# Altium PCB ECE453_Power.PcbDoc
Units mil, origin at the board's own origin, x right, y up, seen from the top; angles counter-clockwise.
Board outline 2347.18 x 3917.24 mil, 2 copper layers (Top Layer, Bottom Layer); 23 components, 8 nets, 63 pads, 19 vias.
Unrouted connection lines stored in the file: 8.
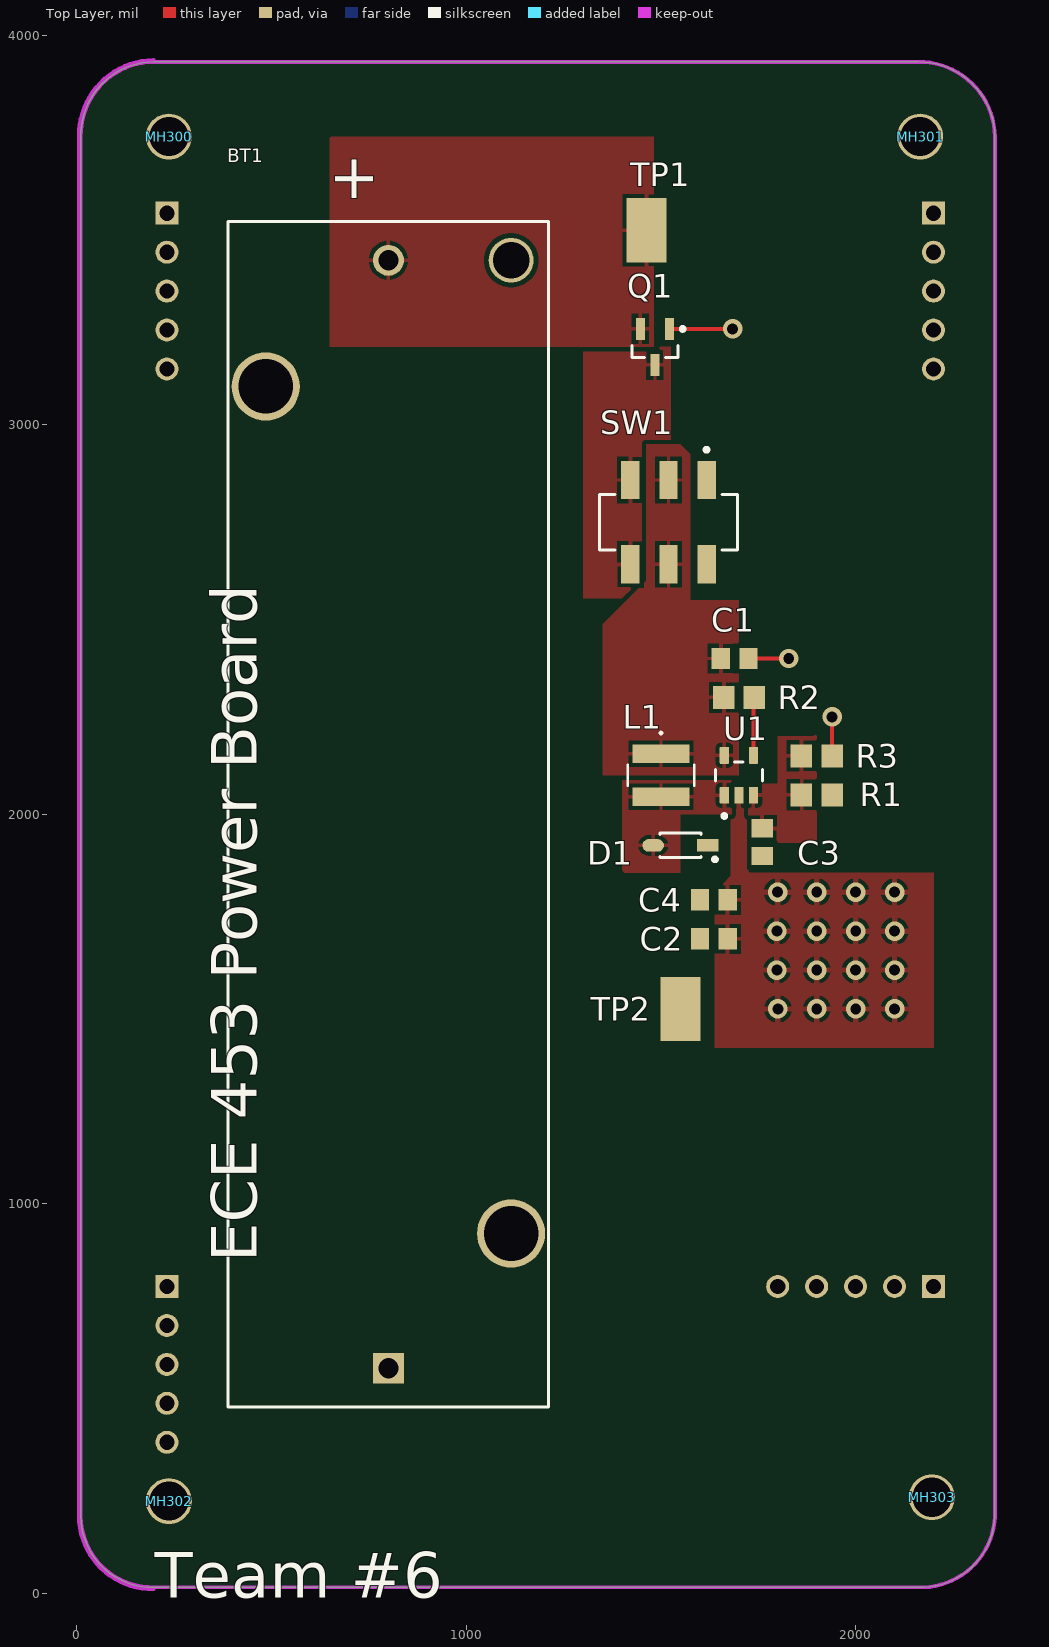
[diagram p0: Top Layer view]
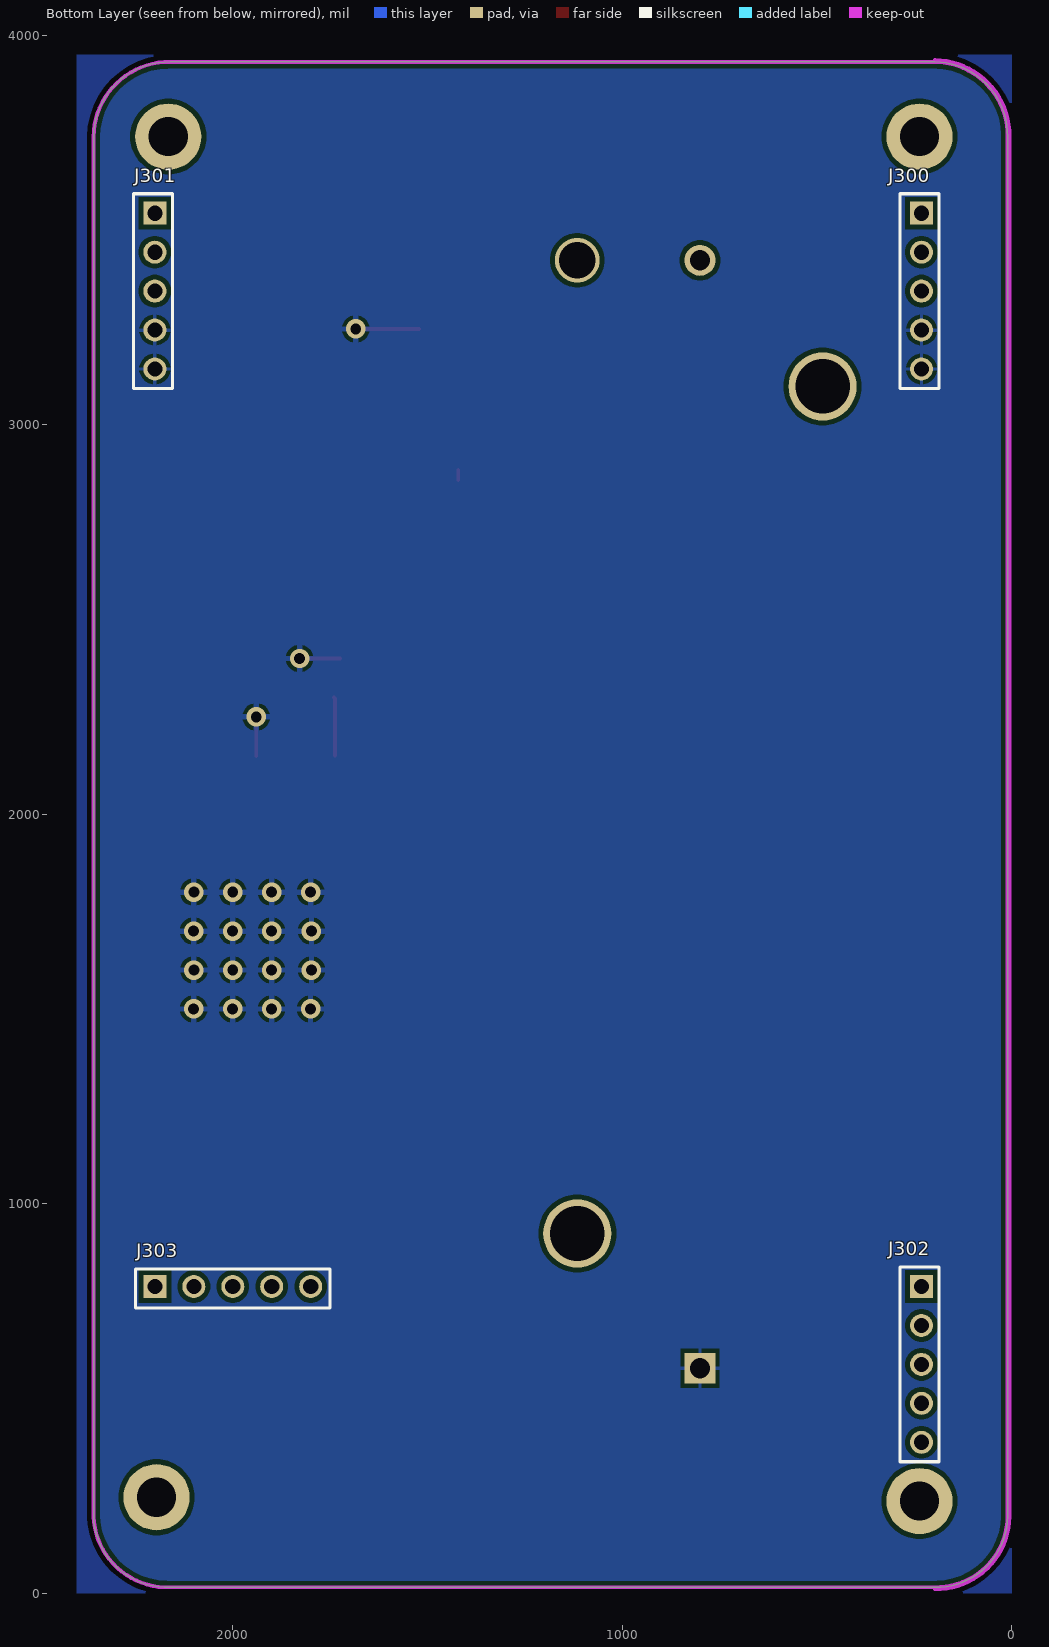
[diagram p1: Bottom Layer view, seen from below]
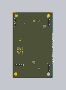
[diagram p2: 3D render of the assembled board from below, using the file's embedded part models]

## Layer stack, top to bottom
Top Solder: solder mask 0.4, Solder Resist, Dk 3.5
Top Layer: signal copper 1.4
Dielectric1: dielectric 12.6, FR-4, Dk 4.8
Bottom Layer: signal copper 1.4
Bottom Solder: solder mask 0.4, Solder Resist, Dk 3.5

## Board outline
10.01,196.88 ccw(c194.35,199.35) 196.78,15.01 cw(c196.85,10) 196.85,15.02 2160.35,15.02 cw(c2160.35,10) 2160.58,15.01 ccw(c2167.85,204.35) 2357.19,196.95 2357.19,3740.13 ccw(c2162.85,3737.66) 2160.45,3931.99 ccw(c2162.85,3737.66) 2160.42,3931.99 2160.45,3931.99 cw(c2160.35,3937.01) 2160.35,3931.99 200,3931.99 cw(c200,3937.01) 198.43,3932.25 cw(c196.85,3937.01) 196.91,3931.99 ccw(c199.35,3742.66) 10.01,3740.25 ccw(c199.35,3742.66) 10.01,3740.22 10.01,3740.25 cw(c5,3740.16) 10.01,3740.16 10.01,196.88 cw(c194.35,199.35)

## Design rules (kind name [scope] priority, off if disabled: settings)
Clearance Polygon_Clearance [All vs InPolygon] p1: gap=12 ignorepadtopadclearanceinfootprint=FALSE except(0: Arc-Hole Track-Hole SMDPad-Hole THPad-Hole Via-Hole Fill-Hole Poly-Hole Region-Hole Text-Hole)
Clearance [All] p2: gap=7.87 ignorepadtopadclearanceinfootprint=TRUE except(0: Arc-Hole Track-Hole SMDPad-Hole THPad-Hole Via-Hole Fill-Hole Poly-Hole Region-Hole Text-Hole)
ComponentClearance [InComponent('U3')] p1: gap=0 collisioncheckmode=3 verticalgap=10 showdistances=FALSE
Height [All] p1: minheight=0 maxheight=866.14 prefheight=500
HoleSize [All] p1: absolutevalues=TRUE maxlimit=250 minlimit=1.18 maxpercent=80.000 minpercent=20.000
MinimumSolderMaskSliver [All] p1: minsoldermaskwidth=7
NetAntennae NetAntennae_5.0V [InNet('5.0V')] p1: netantennaetolerance=0
NetAntennae NetAntennae_3.3V [InNet('3.3V')] p2: netantennaetolerance=0
PolygonConnect [IsNamedPolygon('5.0V_L01_P019') or IsNamedPolygon('3.3V_L01_P020') vs IsVia] p1: connectstyle=Relief reliefconductorwidth=10 reliefentries=4 polygonreliefangle="90 Angle" airgapwidth=10
PolygonConnect PolygonConnect_2 [All vs IsVia] p2: connectstyle=Relief reliefconductorwidth=15 reliefentries=4 polygonreliefangle="90 Angle" airgapwidth=10
PolygonConnect PolygonConnect_1 [All] p3: connectstyle=Relief reliefconductorwidth=10 reliefentries=4 polygonreliefangle="90 Angle" airgapwidth=10
RoutingVias [All] p1: holewidth=28 width=50 viastyle="Through Hole" minholewidth=15 minwidth=25 maxholewidth=28 maxwidth=50
SolderMaskExpansion [All] p1: expansion=4 istentingtop=FALSE
Width [All] p1: maxlimit=472.44 minlimit=3.94 preferedwidth=10 minimp=50.000000 maximp=50.000000 favimp=50.000000
25 further rules are at their usual default settings.

## Components (designator, comment, footprint, x,y, rotation, side; value= is the part's Value field where it differs from the comment)
BT1 "1043" Keystone_1043_0 800,2000 r90 top
C1 "CAP_0805_U_010_00" CAP_0805 1689.17,2400 r180 top value=10µF
C2 "CAP_0805_U_010_00" CAP_0805 1635.43,1679.99 r180 top value=10µF
C3 "CAP_0805_N_001_80" CAP_0805 1760.04,1928.35 r270 top
C4 "CAP_0805_U_010_00" CAP_0805 1635.43,1779.99 r180 top value=10µF
D1 "SM5817PL-TP" On_Semiconductor_425-04_IPC_A 1550,1920.01 r180 top
J300 "CONN_HEADER_MALE_1x5" HDR1X5 236.22,3543.31 r270 bottom
J301 "CONN_HEADER_MALE_1x5" HDR1X5 2204.72,3543.31 r270 bottom
J302 "CONN_HEADER_MALE_1x5" HDR1X5 236.22,787.4 r270 bottom
J303 "CONN_HEADER_MALE_1x5" HDR1X5 2199.61,782.28 r180 bottom
L1 "NRS4018T2R2MDGJ" IND_TAIYO_NRS4018_TAY 1500,2100 r270 top
MH300 "MHOLE_2_55MM" MHOLE_2_55MM#1 236.22,3740.16 r90 top locked
MH301 "MHOLE_2_55MM" MHOLE_2_55MM#1 2165.35,3740.16 r90 top locked
MH302 "MHOLE_2_55MM" MHOLE_2_55MM#1 236.22,236.22 r90 top locked
MH303 "MHOLE_2_55MM" MHOLE_2_55MM#2 2165.35,236.22 r0 top locked
Q1 "SSM3J328R,LF" SOT-23_M 1484.51,3200 r270 top
R1 "30K" RES_0805 1900,2050 r180 top
R2 "RES_0805_K_010.00" RES_0805 1700.2,2300 r180 top
R3 "RES_0805_K_010.00" RES_0805 1899.89,2150 r180 top
SW1 "JS202011SCQN" C&K_Components_0_MFG 1519.18,2750 r180 top
TP1 "TP_1206" TP-SMC-1206 1462.4,3500 r90 top
TP2 "TP_1206" TP-SMC-1206 1550,1500 r270 top
U1 "LM2735XMF-NOPB" Texas_Instruments_DBV0005A_0 1700,2100 r90 top

## Footprints (in the part's own frame and the unit in brackets; to place one, negate y for a bottom-side part, rotate by r counter-clockwise, add the part's x,y. Pads: shape width x height; smd on the part's side, far side on the other; paste and mask are expansions set on the pad)
C&K_Components_0_MFG [mm]
  rect 1.2x2.5 smd paste+0 mask+0: 1(-2.5,-2.75) 2(0,-2.75) 3(2.5,-2.75) 4(-2.5,2.75) 5(0,2.75) 6(2.5,2.75)
  silkscreen extent -4.5,-4.85 4.5,1.8, body extent -4.5,-3.75 4.5,3.75, height 5.51
CAP_0805 [mm]
  rect 1.2x1.4 smd: 1(-0.9,0) 2(0.9,0)
  body extent -1.07,-0.7 1.07,0.7, height 0.7
HDR1X5 [mil] "Connector; Header; 5 Position"
  rect 59.06x59.06 hole 39: 1(0,5)
  round 59.06 hole 39: 2(100,5) 3(200,5) 4(300,5) 5(400,5)
  silkscreen extent -50,-50 450,50, body extent -50,-50 450,50, height 330
IND_TAIYO_NRS4018_TAY [mil]
  rect 47x146 smd paste+0 mask+0: 1(-55,0) 2(55,0)
  silkscreen extent -111,-86 28,86, body extent -81,-81 81,81, height 71
Keystone_1043_0 [mil]
  rect 79.53x79.53 hole 52 paste-39370.1 mask+0: 1(-1422.5,0)
  round 79.53 hole 52 paste-39370.1 mask+0: 2(1422.5,0)
  round 175 hole 140 unplated paste-39370.1 mask+0: ""(-1076.5,-315) ""(1098.5,315)
  round 115 hole 94 unplated paste-39370.1 mask+0: ""(1422.5,-315)
  silkscreen extent -1522,-412 1522,412, body extent -1526,-415 1526,415, height 10
MHOLE_2_55MM#1 [mm] "2.55MM Mounting Hole"
  round 3 / inner round 4.572 / far side round 4.318 hole 2.55: 1(0,0)
MHOLE_2_55MM#2 [mm]
  round 3 / inner round 4.572 / far side round 4.318 hole 2.55: 1(0.762,0.254)
On_Semiconductor_425-04_IPC_A [mm]
  rect 1.408x0.822 smd paste+0 mask+0: 1(-1.78,0)
  rrect100% 1.408x0.822 smd paste+0 mask+0: 2(1.78,0)
  silkscreen extent -2.37,-0.8 1.35,1.04, body extent -2.98,-1.3 2.98,1.3, height 0.25
RES_0805 [mm]
  rect 1.4x1.5 smd: 1(-1,0) 2(1,0)
  body extent -1.07,-0.7 1.07,0.7, height 0.7
SOT-23_M [mm]
  rect 1.45x0.6 smd: 1(-1.175,0.95) 2(-1.175,-0.95) 3(1.175,0)
  silkscreen extent -1.3,-1.5 0.7,1.93, body extent -0.7,-1.5 0.7,1.5, height 1.1
Texas_Instruments_DBV0005A_0 [mm]
  rrect17% 1.1x0.6 smd paste+0 mask+0: 1(-1.3,0.95) 2(-1.3,0) 3(-1.3,-0.95) 4(1.3,-0.95) 5(1.3,0.95)
  silkscreen extent -2.77,-1.53 0.87,1.53, body extent -1.95,-1.63 1.95,1.63, height 0.25
TP-SMC-1206 [mm]
  rect 4.2x2.6 smd mask+0: 1(0,0)
  body extent -1.57,-0.79 1.63,0.81, height 1.22

## Part data
BT1: "Cylindrical Battery Contacts, Clips, Holders & Springs 18650 PCB PLASTIC BATT HLDR THM 1 CELL", Manufacturer 1="Keystone Electronics", Max Operating Temperature=145°C, Min Operating Temperature=-50°C, Package Quantity=100, Supplier Part Number 1=36-1043-ND, Body Material=Nylon, Category="Passive Components", ComponentLink1Description=https://datasheet.ciiva.com/4/1043-4710.pdf?src-supplier=Digi-Key, ComponentLink1URL=https://datasheet.ciiva.com/4/1043-4710.pdf?src-supplier=Digi-Key, ComponentLink2Description=https://datasheet.ciiva.com/3353/1043-eng-tds-3353208.pdf?src-supplier=Distrelec, ComponentLink2URL=https://datasheet.ciiva.com/3353/1043-eng-tds-3353208.pdf?src-supplier=Distrelec, ComponentLink3Description=https://datasheet.ciiva.com/41803/1043-41803215.pdf?src-supplier=Digi-Key, ComponentLink3URL=https://datasheet.ciiva.com/41803/1043-41803215.pdf?src-supplier=Digi-Key, ComponentLink4Description=https://datasheet.ciiva.com/4642/1043-4642493.pdf?src-supplier=Mouser, ComponentLink4URL=https://datasheet.ciiva.com/4642/1043-4642493.pdf?src-supplier=Mouser, Contact Material="Stainless Steel", Contact Plating=Gold, Manufacturer Part Number 1=1043, Material=Nylon, Mount="Through Hole,PCB", Number of Cells=1, Number of Pins=1, Packaging=Tray, Pricing 1="1=3.00000, 25=2.52400, 100=2.08850, 250=1.92020, 500=1.80144 (USD)", RoHS=Yes, Stock 1=3564, Supplier 1=Digi-Key, Termination="PC Pin"
C1 C2 C4: "CAP CER 10UF 10V X5R 0805", Manufacturer="Samsung Electro-Mechanics America, Inc.", Manufacturer Part Number=CL21A106KPCLQNC, Operating Temperature="-55°C ~ 85°C", Package / Case="0805 (2012 Metric)", Ratings=-, Supplier Part Number 1=1276-2402-1-ND, Temperature Coefficient=X5R, Tolerance=±10%, Voltage - Rated=10V, Applications="General Purpose", Category=Capacitors, ComponentLink1Description=http://media.digikey.com/pdf/Data%20Sheets/Samsung%20PDFs/CL21A106KPCLQNC_character.pdf, ComponentLink1URL=http://media.digikey.com/pdf/Data%20Sheets/Samsung%20PDFs/CL21A106KPCLQNC_character.pdf, Features=-, Height - Seated (Max)=-, Lead Spacing=-, Lead Style=-, Mounting Type="Surface Mount, MLCC", Packaging="Cut Tape (CT)", Pricing 1="1=0.2, 10=0.14, 25=0.1052, 50=0.0806, 100=0.0665, 500=0.0469, 1000=0.0385 (USD)", RoHS="RoHS Compliant", Size / Dimension="0.079\" L x 0.049\" W (2.00mm x 1.25mm)", Stock 1=97192, Supplier 1=Digi-Key, Thickness (Max)="0.037\" (0.95mm)"
C3: "MURATA - GRM2165C1H182JA01D - SMD Multilayer Ceramic Capacitor, 1800 pF, 50 V, 0805 [2012 Metric], ± 5%, C0G / NP0, GRM Series", Capacitance=1.8nF, Case Code (Imperial)=0805, Case Code (Metric)=2012, Dielectric=C0G, Manufacturer 1=Murata, Manufacturer Part Number 1=GRM2165C1H182JA01D, Max Operating Temperature=125°C, Min Operating Temperature=-55°C, Package Quantity=1, Supplier Part Number 1=490-1626-1-ND, Temperature Coefficient=30ppm/°C, Tolerance=5%, Voltage=50V, Case/Package=0805, Category="Ceramic Capacitors", ComponentLink1Description=https://datasheet.ciiva.com/25730/cl21a106kpclqnc-25730594.pdf, ComponentLink1URL=https://datasheet.ciiva.com/25730/cl21a106kpclqnc-25730594.pdf, ComponentLink2Description=https://datasheet.ciiva.com/134/partnumbering-e-01-134098.pdf?src-supplier=Digi-Key, ComponentLink2URL=https://datasheet.ciiva.com/134/partnumbering-e-01-134098.pdf?src-supplier=Digi-Key, ComponentLink3Description=https://datasheet.ciiva.com/26920/getdatasheetpartid-355170-26920201.pdf, ComponentLink3URL=https://datasheet.ciiva.com/26920/getdatasheetpartid-355170-26920201.pdf, ComponentLink4Description=https://datasheet.ciiva.com/134/partnumbering-e-01-134100.pdf?src-supplier=Digi-Key, ComponentLink4URL=https://datasheet.ciiva.com/134/partnumbering-e-01-134100.pdf?src-supplier=Digi-Key, ComponentLink5Description=https://datasheet.ciiva.com/134/partnumbering-e-01-134099.pdf?src-supplier=Digi-Key, ComponentLink5URL=https://datasheet.ciiva.com/134/partnumbering-e-01-134099.pdf?src-supplier=Digi-Key, Construction=Flat, Depth=1.25mm, Height=0.6mm, Lead Free="Lead Free", Length=2mm, Mount="Surface Mount", Packaging="Tape and Reel", Pricing 1="1=0.20000, 10=0.14000, 50=0.08380, 100=0.07080, 500=0.04844, 1000=0.04285 (USD)", Radiation Hardening=No, REACH SVHC="No SVHC", RoHS=Yes, RoHS Compliant=Yes, Series=GRM, Stock 1=44565, Supplier 1=Digi-Key, Termination=SMD/SMT, Thickness=0.028inch, Voltage Rating=50V, Voltage Rating (DC)=50V, Width=0.049inch
D1: "DIODE SCHOTTKY 20V 1A SOD123FL", Average Rectified Current=1A, Forward Voltage=450mV, Manufacturer 2=MCC, Max Operating Temperature=125°C, Max Reverse Voltage (DC)=20V, Max Surge Current=30A, Min Operating Temperature=-65°C, Package Quantity=1, Supplier Part Number 1=SM5817PL-TPMSCT-ND, Category="Rectifier Diodes", ComponentLink1Description=https://datasheet.ciiva.com/15200/getdatasheetpartid-487494-15200581.pdf?src-supplier=Verical, ComponentLink1URL=https://datasheet.ciiva.com/15200/getdatasheetpartid-487494-15200581.pdf?src-supplier=Verical, ComponentLink2Description=https://datasheet.ciiva.com/912/sm5817pl-sm5819plsod-123fl-912827.pdf?src-supplier=Digi-Key, ComponentLink2URL=https://datasheet.ciiva.com/912/sm5817pl-sm5819plsod-123fl-912827.pdf?src-supplier=Digi-Key, Element Configuration=Single, Manufacturer Part Number 2=SM5817PL-TP, Mount="Surface Mount", Number of Pins=2, Packaging="Tape and Reel", Peak Non-Repetitive Surge Current=30A, Pricing 2="1=0.46000, 10=0.31900, 100=0.16110, 500=0.13144, 1000=0.09752 (USD)", Radiation Hardening=No, Reverse Voltage=20V, RoHS=Yes, RoHS Compliant=Yes, Stock 2=178040, Supplier 1=Digi-Key
J300 J301 J302 J303: "Header, 5-Pin", Color=Black, Manufacturer 1=Sullins, Manufacturer Part Number 1=PREC005SACN-RC, Package Quantity=1, Supplier Part Number 1=S1032EC-05-ND, ComponentLink1Description=http://www.farnell.com/cad/1737268.pdf, ComponentLink1URL=http://www.farnell.com/cad/1737268.pdf, ComponentLink2Description=http://katalog.we-online.de/em/datasheet/6130xx11121.pdf, ComponentLink2URL=http://katalog.we-online.de/em/datasheet/6130xx11121.pdf, ComponentLink3Description=https://datasheet.ciiva.com/741/xrxczzzsxxn-rc-st-11635-b-741840.pdf?src-supplier=Digi-Key, ComponentLink3URL=https://datasheet.ciiva.com/741/xrxczzzsxxn-rc-st-11635-b-741840.pdf?src-supplier=Digi-Key, Connector Type="Male Pin", Contact Mating Length=0.23inch, Contact Plating=Tin, Mount="Through Hole", Number of Positions=5, Number of Rows=1, Packaging=Bulk, Pitch=0.1inch, Pricing 1="1=0.19000, 10=0.17400, 25=0.12960, 50=0.11120, 100=0.10740, 250=0.09264, 500=0.08892 (USD)", RoHS=Yes, Stock 1=0, Supplier 1=Digi-Key, Termination=Solder
L1: "Inductor Power Shielded Wirewound 2.2uH 20% 100KHz Ferrite 2.2A 0.0504Ohm DCR 1515 T/R", Case/Package=Nonstandard, Current Rating=2.2A, DC Resistance (DCR)=50.4mR, Inductance=2.2uH, Inductance Tolerance=20%, Manufacturer 1="Taiyo Yuden", Max DC Current=3A, Max Operating Temperature=125°C, Min Operating Temperature=-25°C, Package Quantity=3500, Resistor Type=Wirewound, Self Resonant Frequency=60MHz, Supplier Part Number 1=587-2890-1-ND, Test Frequency=100kHz, Category="Fixed Inductors", ComponentLink1Description=https://datasheet.ciiva.com/8502/nr6028t2r2n-ss-8502679.pdf?src-supplier=Avnet, ComponentLink1URL=https://datasheet.ciiva.com/8502/nr6028t2r2n-ss-8502679.pdf?src-supplier=Avnet, ComponentLink2Description=https://datasheet.ciiva.com/15988/8nr6028t2r2n-15988110.pdf?src-supplier=Onlinecomponents.com, ComponentLink2URL=https://datasheet.ciiva.com/15988/8nr6028t2r2n-15988110.pdf?src-supplier=Onlinecomponents.com, ComponentLink3Description=https://datasheet.ciiva.com/7291/nr6028t2r2n-ss-7291637.pdf?src-supplier=Newark, ComponentLink3URL=https://datasheet.ciiva.com/7291/nr6028t2r2n-ss-7291637.pdf?src-supplier=Newark, ComponentLink4Description=https://datasheet.ciiva.com/1043/wound04-e-1043090.pdf?src-supplier=Digi-Key, ComponentLink4URL=https://datasheet.ciiva.com/1043/wound04-e-1043090.pdf?src-supplier=Digi-Key, ComponentLink5Description=https://datasheet.ciiva.com/1043/wound04-e-1043091.pdf?src-supplier=Digi-Key, ComponentLink5URL=https://datasheet.ciiva.com/1043/wound04-e-1043091.pdf?src-supplier=Digi-Key, ComponentLink6Description=https://datasheet.ciiva.com/1043/wound04-e-1043092.pdf?src-supplier=Digi-Key, ComponentLink6URL=https://datasheet.ciiva.com/1043/wound04-e-1043092.pdf?src-supplier=Digi-Key, ComponentLink7Description=https://datasheet.ciiva.com/8502/nrs4018t2r2mdgj-ss-8502646.pdf?src-supplier=Avnet, ComponentLink7URL=https://datasheet.ciiva.com/8502/nrs4018t2r2mdgj-ss-8502646.pdf?src-supplier=Avnet, ComponentLink8Description=https://datasheet.ciiva.com/7291/nrs4018t2r2mdgj-ss-7291680.pdf?src-supplier=Newark, ComponentLink8URL=https://datasheet.ciiva.com/7291/nrs4018t2r2mdgj-ss-7291680.pdf?src-supplier=Newark, ComponentLink9Description=https://datasheet.ciiva.com/25607/0900766b810b3cd2-25607949.pdf?src-supplier=RSComponents, ComponentLink9URL=https://datasheet.ciiva.com/25607/0900766b810b3cd2-25607949.pdf?src-supplier=RSComponents, Core Material=Ferrite, Depth=4.2mm, Halogen Free="Halogen Free", Height=1.8mm, Height - Seated (Max)=0.071inch, Lead Free="Lead Free", Lead Pitch=2.8mm, Length=4mm, Manufacturer Part Number 1=NRS4018T2R2MDGJ, Mount="Surface Mount", Number of Pins=2, Packaging="Tape and Reel", Pricing 1="1=0.27000, 10=0.23800, 25=0.20840, 50=0.17860, 100=0.16370, 250=0.14884, 500=0.13990, 1000=0.10716 (USD)", Radiation Hardening=No, REACH SVHC=Unknown, RMS Current (Irms)=2.2A, RoHS=Yes, RoHS Compliant=Yes, Saturation Current=3A, Series=NRS, Shielding=Shielded, Stock 1=291635, Supplier 1=Digi-Key, Termination=SMD/SMT, Tolerance=20%, Width=0.157inch
MH300 MH301 MH302 MH303: "Mounting Holde", Manufacturer Part Number="UW MTHOLE"
Q1: "MOSFET P-CH 20V 6A SOT23F", Case/Package=SOT-23-3, Continuous Drain Current (ID)=6A, Drain to Source Breakdown Voltage=-20V, Drain to Source Resistance=47.4mR, Drain to Source Voltage (Vdss)=20V, Gate to Source Voltage (Vgs)=8V, Input Capacitance=840pF, Manufacturer 1=Toshiba, Max Operating Temperature=150°C, Max Power Dissipation=1W, Min Operating Temperature=-55°C, Package Quantity=3000, Power Dissipation=2W, Supplier Part Number 1=SSM3J328RLFCT-ND, Category=MOSFETs, ComponentLink1Description=https://datasheet.ciiva.com/11158/ssm3j328r-datasheet-en-20140301-11158652.pdf?src-supplier=Avnet, ComponentLink1URL=https://datasheet.ciiva.com/11158/ssm3j328r-datasheet-en-20140301-11158652.pdf?src-supplier=Avnet, ComponentLink2Description=https://datasheet.ciiva.com/24106/ssm3j328r-datasheet-en-20140301-24106699.pdf?src-supplier=Mouser, ComponentLink2URL=https://datasheet.ciiva.com/24106/ssm3j328r-datasheet-en-20140301-24106699.pdf?src-supplier=Mouser, ComponentLink3Description=https://datasheet.ciiva.com/45425/ssm3j328r-datasheet-en-20140301-45425519.pdf?src-supplier=Digi-Key, ComponentLink3URL=https://datasheet.ciiva.com/45425/ssm3j328r-datasheet-en-20140301-45425519.pdf?src-supplier=Digi-Key, ComponentLink4Description=https://datasheet.ciiva.com/45425/ssm3j328r-datasheet-en-20140301-45425813.pdf?src-supplier=Digi-Key, ComponentLink4URL=https://datasheet.ciiva.com/45425/ssm3j328r-datasheet-en-20140301-45425813.pdf?src-supplier=Digi-Key, Element Configuration=Single, Manufacturer Part Number 1=SSM3J328R,LF, Mount="Surface Mount", Number of Channels=1, Number of Elements=1, Number of Pins=3, Packaging="Tape and Reel", Polarity=P-CHANNEL, Pricing 1="1=0.43000, 10=0.32200, 25=0.29040, 100=0.20060, 500=0.13728, 1000=0.10560 (USD)", Radiation Hardening=No, Rds On Max=29.8mR, RoHS=Yes, RoHS Compliant=Yes, Stock 1=476474, Supplier 1=Digi-Key, Turn-Off Delay Time=107ns, Turn-On Delay Time=32ns
R1: library part RES_0805_K_030.00, "Res Thick Film 0805 30K Ohm 1% 0.125W(1/8W) ±100ppm/°C Pad SMD Automotive T/R", Case Code (Imperial)=0805, Case Code (Metric)=2012, Manufacturer 1=Panasonic, Manufacturer Part Number 1=ERJ-6ENF3002V, Max Operating Temperature=155°C, Max Power Dissipation=125mW, Min Operating Temperature=-55°C, Package Quantity=1, Resistance Tolerance=1%, Resistor Type="Thick Film", Supplier Part Number 1=P30.0KCCT-ND, Temperature Coefficient=100ppm/°C, Voltage Rating=150V, Case/Package=0805, Category="Chip SMD Resistors", ComponentLink1Description=https://datasheet.ciiva.com/11821/0900766b80f80784-11821600.pdf?src-supplier=RSComponents, ComponentLink1URL=https://datasheet.ciiva.com/11821/0900766b80f80784-11821600.pdf?src-supplier=RSComponents, ComponentLink2Description=https://datasheet.ciiva.com/9117/aoa0000ce2-9117485.pdf?src-supplier=Avnet, ComponentLink2URL=https://datasheet.ciiva.com/9117/aoa0000ce2-9117485.pdf?src-supplier=Avnet, ComponentLink3Description=https://datasheet.ciiva.com/24124/aoa0000ce2-24124393.pdf?src-supplier=Mouser, ComponentLink3URL=https://datasheet.ciiva.com/24124/aoa0000ce2-24124393.pdf?src-supplier=Mouser, ComponentLink4Description=https://datasheet.ciiva.com/30169/aoa0000ce2-30169447.pdf?src-supplier=Onlinecomponents.com, ComponentLink4URL=https://datasheet.ciiva.com/30169/aoa0000ce2-30169447.pdf?src-supplier=Onlinecomponents.com, ComponentLink5Description=https://datasheet.ciiva.com/17210/aoa0000ce2-17210478.pdf?src-supplier=Avnet+Europe, ComponentLink5URL=https://datasheet.ciiva.com/17210/aoa0000ce2-17210478.pdf?src-supplier=Avnet+Europe, ComponentLink6Description=https://datasheet.ciiva.com/22673/1678782-22673293.pdf?src-supplier=Element14, ComponentLink6URL=https://datasheet.ciiva.com/22673/1678782-22673293.pdf?src-supplier=Element14, ComponentLink7Description=https://datasheet.ciiva.com/28565/1694929-28565193.pdf?src-supplier=Element14, ComponentLink7URL=https://datasheet.ciiva.com/28565/1694929-28565193.pdf?src-supplier=Element14, ComponentLink8Description=https://datasheet.ciiva.com/46441/1678782-46441405.pdf?src-supplier=Element14, ComponentLink8URL=https://datasheet.ciiva.com/46441/1678782-46441405.pdf?src-supplier=Element14, ComponentLink9Description=https://datasheet.ciiva.com/46441/1678782-46441406.pdf?src-supplier=Element14, ComponentLink9URL=https://datasheet.ciiva.com/46441/1678782-46441406.pdf?src-supplier=Element14, ComponentLink10Description=https://datasheet.ciiva.com/16512/aoa0000ce2-16512236.pdf?src-supplier=Avnet+Asia, ComponentLink10URL=https://datasheet.ciiva.com/16512/aoa0000ce2-16512236.pdf?src-supplier=Avnet+Asia, ComponentLink11Description=https://datasheet.ciiva.com/7711/1678782-7711062.pdf?src-supplier=Element14, ComponentLink11URL=https://datasheet.ciiva.com/7711/1678782-7711062.pdf?src-supplier=Element14, Construction=Rectangular, Contact Plating=Tin, Depth=1.25mm, Features="Automotive AEC-Q200", Height=0.6mm, Lead Free="Lead Free", Length=2mm, Military Standard=Not, Mount="Surface Mount", Number of Terminations=2, Packaging="Tape and Reel", Power Rating=125mW, Pricing 1="1=0.10000, 10=0.07500, 100=0.02880, 1000=0.01265, 2500=0.01092 (USD)", Radiation Hardening=No, REACH SVHC=Unknown, Resistance=30K, RoHS=Yes, RoHS Compliant=Yes, Series=ERJ, Stock 1=296893, Supplier 1=Digi-Key, Technology="THICK FILM", Termination=SMD/SMT, Tolerance=1%, Voltage Rating (DC)=150V, Weight=0.000194oz, Width=0.049inch
R2: "RES SMD 10K OHM 1% 1/8W 0805", Case Code (Imperial)=0805, Case Code (Metric)=2012, Manufacturer 1=Yageo, Manufacturer Part Number 1=RC0805FR-0710KL, Max Operating Temperature=155°C, Max Power Dissipation=125mW, Min Operating Temperature=-55°C, Package Quantity=1, Resistance=100kR, Resistance Tolerance=1%, Resistor Type="Thick Film", Supplier Part Number 1=311-10.0KCRCT-ND, Temperature Coefficient=100ppm/°C, Voltage Rating=150V, Case/Package=0805, Category="Chip SMD Resistors", ComponentLink1Description=https://datasheet.ciiva.com/11808/0900766b8106beab-11808151.pdf?src-supplier=RSComponents, ComponentLink1URL=https://datasheet.ciiva.com/11808/0900766b8106beab-11808151.pdf?src-supplier=RSComponents, ComponentLink2Description=https://datasheet.ciiva.com/12669/rc0805-12669688.pdf?src-supplier=Mouser, ComponentLink2URL=https://datasheet.ciiva.com/12669/rc0805-12669688.pdf?src-supplier=Mouser, ComponentLink3Description=https://datasheet.ciiva.com/46447/444164-46447563.pdf?src-supplier=Element14, ComponentLink3URL=https://datasheet.ciiva.com/46447/444164-46447563.pdf?src-supplier=Element14, ComponentLink4Description=https://datasheet.ciiva.com/2456/pyu-r-int-thick-7-2456972.pdf?src-supplier=Digi-Key, ComponentLink4URL=https://datasheet.ciiva.com/2456/pyu-r-int-thick-7-2456972.pdf?src-supplier=Digi-Key, ComponentLink5Description=https://datasheet.ciiva.com/2456/pyu-r-int-thick-7-2456973.pdf?src-supplier=Digi-Key, ComponentLink5URL=https://datasheet.ciiva.com/2456/pyu-r-int-thick-7-2456973.pdf?src-supplier=Digi-Key, ComponentLink6Description=https://datasheet.ciiva.com/2456/pyu-r-int-thick-7-2456974.pdf?src-supplier=Digi-Key, ComponentLink6URL=https://datasheet.ciiva.com/2456/pyu-r-int-thick-7-2456974.pdf?src-supplier=Digi-Key, ComponentLink7Description=https://datasheet.ciiva.com/16747/rc0805-16747087.pdf?src-supplier=Future+Electronics, ComponentLink7URL=https://datasheet.ciiva.com/16747/rc0805-16747087.pdf?src-supplier=Future+Electronics, Construction=Rectangular, Depth=1.25mm, Features="Moisture Resistant", Height=0.024inch, Lead Free="Lead Free", Length=2mm, Military Standard=Not, Number of Terminations=2, Packaging="Tape and Reel", Power Rating=125mW, Pricing 1="1=0.10000, 10=0.04200, 100=0.01690, 1000=0.00759, 2500=0.00659 (USD)", REACH SVHC=Unknown, RoHS=Yes, RoHS Compliant=Yes, Series=RC, Size Code=0805, Stock 1=7562122, Supplier 1=Digi-Key, Technology="THICK FILM", Termination=SMD/SMT, Tolerance=1%, Width=0.049inch
R3: "RES SMD 10K OHM 1% 1/8W 0805", Case Code (Imperial)=0805, Case Code (Metric)=2012, Manufacturer 1=Yageo, Manufacturer Part Number 1=RC0805FR-0710KL, Max Operating Temperature=155°C, Max Power Dissipation=125mW, Min Operating Temperature=-55°C, Package Quantity=1, Resistance=10kR, Resistance Tolerance=1%, Resistor Type="Thick Film", Supplier Part Number 1=311-10.0KCRCT-ND, Temperature Coefficient=100ppm/°C, Voltage Rating=150V, Case/Package=0805, Category="Chip SMD Resistors", ComponentLink1Description=https://datasheet.ciiva.com/11808/0900766b8106beab-11808151.pdf?src-supplier=RSComponents, ComponentLink1URL=https://datasheet.ciiva.com/11808/0900766b8106beab-11808151.pdf?src-supplier=RSComponents, ComponentLink2Description=https://datasheet.ciiva.com/12669/rc0805-12669688.pdf?src-supplier=Mouser, ComponentLink2URL=https://datasheet.ciiva.com/12669/rc0805-12669688.pdf?src-supplier=Mouser, ComponentLink3Description=https://datasheet.ciiva.com/46447/444164-46447563.pdf?src-supplier=Element14, ComponentLink3URL=https://datasheet.ciiva.com/46447/444164-46447563.pdf?src-supplier=Element14, ComponentLink4Description=https://datasheet.ciiva.com/2456/pyu-r-int-thick-7-2456972.pdf?src-supplier=Digi-Key, ComponentLink4URL=https://datasheet.ciiva.com/2456/pyu-r-int-thick-7-2456972.pdf?src-supplier=Digi-Key, ComponentLink5Description=https://datasheet.ciiva.com/2456/pyu-r-int-thick-7-2456973.pdf?src-supplier=Digi-Key, ComponentLink5URL=https://datasheet.ciiva.com/2456/pyu-r-int-thick-7-2456973.pdf?src-supplier=Digi-Key, ComponentLink6Description=https://datasheet.ciiva.com/2456/pyu-r-int-thick-7-2456974.pdf?src-supplier=Digi-Key, ComponentLink6URL=https://datasheet.ciiva.com/2456/pyu-r-int-thick-7-2456974.pdf?src-supplier=Digi-Key, ComponentLink7Description=https://datasheet.ciiva.com/16747/rc0805-16747087.pdf?src-supplier=Future+Electronics, ComponentLink7URL=https://datasheet.ciiva.com/16747/rc0805-16747087.pdf?src-supplier=Future+Electronics, Construction=Rectangular, Depth=1.25mm, Features="Moisture Resistant", Height=0.024inch, Lead Free="Lead Free", Length=2mm, Military Standard=Not, Number of Terminations=2, Packaging="Tape and Reel", Power Rating=125mW, Pricing 1="1=0.10000, 10=0.04200, 100=0.01690, 1000=0.00759, 2500=0.00659 (USD)", REACH SVHC=Unknown, RoHS=Yes, RoHS Compliant=Yes, Series=RC, Size Code=0805, Stock 1=7562122, Supplier 1=Digi-Key, Technology="THICK FILM", Termination=SMD/SMT, Tolerance=1%, Width=0.049inch
SW1: "C & K COMPONENTS - JS202011SCQN - SWITCH, DPDT, 0.6A, 6VDC, SMD", Actuator Color=Black, Contact Current Rating=300mA, Contact Resistance=70mR, Flammability Rating="UL94 V-2", Manufacturer 1="ITT C&K", Max Operating Temperature=85°C, Max Voltage Rating (DC)=6V, Min Operating Temperature=-20°C, Package Quantity=1, Supplier Part Number 1=401-2002-1-ND, Actuator Length=2mm, Actuator Material=Nylon,Polyamide,PA46, Actuator Type=Standard, Category="Slide Switches", ComponentLink1Description=https://datasheet.ciiva.com/2889/js-29aug13-2889127.pdf?src-supplier=Digi-Key, ComponentLink1URL=https://datasheet.ciiva.com/2889/js-29aug13-2889127.pdf?src-supplier=Digi-Key, ComponentLink2Description=https://datasheet.ciiva.com/23829/1707718-23829488.pdf?src-supplier=Newark, ComponentLink2URL=https://datasheet.ciiva.com/23829/1707718-23829488.pdf?src-supplier=Newark, ComponentLink3Description=https://datasheet.ciiva.com/8625/js-9dec14-8625470.pdf?src-supplier=Avnet, ComponentLink3URL=https://datasheet.ciiva.com/8625/js-9dec14-8625470.pdf?src-supplier=Avnet, ComponentLink4Description=https://datasheet.ciiva.com/2889/js-15sept15-2889128.pdf?src-supplier=Digi-Key, ComponentLink4URL=https://datasheet.ciiva.com/2889/js-15sept15-2889128.pdf?src-supplier=Digi-Key, ComponentLink5Description=https://datasheet.ciiva.com/2889/js-15sept15-2889129.pdf?src-supplier=Digi-Key, ComponentLink5URL=https://datasheet.ciiva.com/2889/js-15sept15-2889129.pdf?src-supplier=Digi-Key, ComponentLink6Description=https://datasheet.ciiva.com/22630/1707718-22630697.pdf?src-supplier=Element14, ComponentLink6URL=https://datasheet.ciiva.com/22630/1707718-22630697.pdf?src-supplier=Element14, Contact Material="Copper Alloy", Contact Plating=Silver, Current Rating=300mA, Depth=7.5mm, Electrical Life=5000Cycles, Housing Material=Nylon, Lead Free="Lead Free", Length=9mm, Manufacturer Part Number 1=JS202011SCQN, Max Current Rating=300mA, Mount="Surface Mount", Orientation=Vertical, Packaging="Tape and Reel", Pricing 1="1=0.55000, 10=0.53000, 25=0.51040, 100=0.44180, 250=0.40252, 500=0.37306 (USD)", Radiation Hardening=No, REACH SVHC="No SVHC", RoHS=Yes, Series=JS, Stock 1=21096, Supplier 1=Digi-Key, Switch Function=On-On, Switch Travel=2mm, Termination="Gull Wing", Throw Configuration=DPDT, Voltage Rating (DC)=6V
TP1 TP2: "Test Point SMD 1206", Case Size=1206, Manufacturer="TE Connectivity (Tyco Electronics)", Manufacturer Part Number=1625854-1, Operating Temperature="-55 to 125 C", Power Rating=N/R, Resistance Value="0 Ohm", Supplier Part Number=A106143CT-ND, ComponentLink1Description=https://datasheet.ciiva.com/6439/eng-ds-1773266-a-6439169.pdf, ComponentLink1URL=https://datasheet.ciiva.com/6439/eng-ds-1773266-a-6439169.pdf, ComponentLink2Description=https://datasheet.ciiva.com/30136/1773266-a-30136341.pdf, ComponentLink2URL=https://datasheet.ciiva.com/30136/1773266-a-30136341.pdf, ComponentLink3Description=https://datasheet.ciiva.com/6439/eng-ds-1773266-a-6439080.pdf, ComponentLink3URL=https://datasheet.ciiva.com/6439/eng-ds-1773266-a-6439080.pdf, ComponentLink4Description=https://datasheet.ciiva.com/6439/eng-ds-1773266-a-6439081.pdf, ComponentLink4URL=https://datasheet.ciiva.com/6439/eng-ds-1773266-a-6439081.pdf, ComponentLink5Description=https://datasheet.ciiva.com/6439/eng-ds-1773266-a-6439083.pdf, ComponentLink5URL=https://datasheet.ciiva.com/6439/eng-ds-1773266-a-6439083.pdf, Dimension="3.2 x 1.6 x 1.25mm", Family=RC, Mounting="Surface Mount", Packaging="Tape and Reel", Part No=1625854-1, Pricing 1="1=0.28, 10=0.261, 25=0.224, 50=0.1902, 100=0.1828, 250=0.1641, 500=0.1567, 1000=0.1306 (USD)", RoHS=Yes, Stock 1=31937, Supplier=Digi-Key, Temperature Coefficient=N/R, Terminal Pitch=N/R, Termination Style=N/R, Tolerance=N/R
U1: "IC REG MULT CONFG ADJ 2.1A SOT23", Case/Package=SOT-23, Manufacturer 1="TI National Semiconductor", Manufacturer Part Number 1=LM2735XMF/NOPB, Max Input Voltage=5.5V, Max Operating Temperature=125°C, Max Output Current=3A, Max Output Voltage=24V, Min Input Voltage=2.7V, Min Operating Temperature=-40°C, Min Output Voltage=3V, Nominal Supply Current=500uA, Package Quantity=1000, Quiescent Current=7mA, Supplier Part Number 1=LM2735XMF/NOPBCT-ND, Switching Frequency=1.6MHz, Category="Voltage Regulators - Switching", ComponentLink1Description=https://datasheet.ciiva.com/22669/1802021-22669478.pdf?src-supplier=Element14, ComponentLink1URL=https://datasheet.ciiva.com/22669/1802021-22669478.pdf?src-supplier=Element14, ComponentLink2Description=https://datasheet.ciiva.com/3220/lm2735-3220073.pdf?src-supplier=Avnet, ComponentLink2URL=https://datasheet.ciiva.com/3220/lm2735-3220073.pdf?src-supplier=Avnet, ComponentLink3Description=https://datasheet.ciiva.com/3221/lm2735-3221644.pdf?src-supplier=Avnet, ComponentLink3URL=https://datasheet.ciiva.com/3221/lm2735-3221644.pdf?src-supplier=Avnet, ComponentLink4Description=https://datasheet.ciiva.com/6579/lm2735-6579929.pdf?src-supplier=Digi-Key, ComponentLink4URL=https://datasheet.ciiva.com/6579/lm2735-6579929.pdf?src-supplier=Digi-Key, ComponentLink5Description=https://datasheet.ciiva.com/6579/lm2735-6579933.pdf?src-supplier=Digi-Key, ComponentLink5URL=https://datasheet.ciiva.com/6579/lm2735-6579933.pdf?src-supplier=Digi-Key, ComponentLink6Description=https://datasheet.ciiva.com/6579/lm2735-6579935.pdf?src-supplier=Digi-Key, ComponentLink6URL=https://datasheet.ciiva.com/6579/lm2735-6579935.pdf?src-supplier=Digi-Key, ComponentLink7Description=https://datasheet.ciiva.com/15223/getdatasheetpartid-142075-15223063.pdf?src-supplier=Verical, ComponentLink7URL=https://datasheet.ciiva.com/15223/getdatasheetpartid-142075-15223063.pdf?src-supplier=Verical, Contact Plating=Tin,Matte, Efficiency=90%, Height=1.02mm, Lead Free="Lead Free", Length=2.92mm, Min Supply Voltage=2.7V, Mount="Surface Mount", Number of Outputs=1, Number of Pins=5, Operating Supply Voltage=5.5V, Output Current=3A, Output Type=Adjustable, Output Voltage=24V, Packaging="Tape and Reel", Pricing 1="1=2.27000, 10=2.03900, 25=1.92400, 100=1.63920, 250=1.53912, 500=1.34672 (USD)", Radiation Hardening=No, REACH SVHC="No SVHC", RoHS=Yes, RoHS Compliant=Yes, Series=LM2735, Stock 1=5135, Supplier 1=Digi-Key, Supply Current=500uA, Synchronous Rectifier=No, Topology=Boost,SEPIC, Width=1.6mm

## Via types
v1: diameter 50, hole 28, Top Layer to Bottom Layer, 19 vias

## Nets (pads, with @x,y where several pads share a name; then routed paths per layer and width w, separated by ;. In a path a pad name is that pad's centre, name@x,y a point inside that pad or via, vN(x,y) a via of type N, cw(c..) or ccw(c..) an arc to the next point about the centre after c; other vN are vias at no path point)
5.0V: C2.2 C3.2 C4.2 D1.1 J300.1 J300.2 J300.3 R1.1 TP2.1
EN: R2.1 U1.4 | length 149.7
  Top Layer w10: U1.4 1737.4,2297.83 R2.1
FB: C3.1 R1.2 R3.2 U1.3
"FET SW": Q1.3 SW1.3 SW1.6 | length 25.6
  Top Layer w10: SW1.3 SW1.3@1420.76,2883.86
GND: BT1.1 C1.1 C2.1 C4.1 J300.4 J300.5 J301.4 J301.5 Q1.1 R3.1 U1.2 | length 365.5
  Top Layer w10: Q1.1 v1(1683.98,3246.26) ; C1.1 v1(1828.01,2400) ; R3.1 1939.37,2150.11 v1(1939.37,2250)
  other v1: 1800,1500 1900,1500 2000,1500 2100,1500 1797.6,1600 1900,1600 1999.61,1600 2099.61,1600 1797.6,1700 1900,1700 2000,1700 2100,1700 1799.61,1800 1900,1800 1999.61,1800 2099.61,1800
SW: D1.2 L1.2 U1.1
VBAT_POS: BT1.2 Q1.2 TP1.1
VIN: C1.2 L1.1 R2.2 SW1.2 SW1.5 U1.5
pads on no net: BT1. J301.1 J301.2 J301.3 J302.1 J302.2 J302.3 J302.4 J302.5 J303.1 J303.2 J303.3 J303.4 J303.5 MH300.1 MH301.1 MH302.1 MH303.1 SW1.1 SW1.4

## Polygon pours and split planes (outlines as drawn)
GND on Bottom Layer "GND_L02_P001" (solid, pour order 1): 0,3950 2400,3950 2400,0 0,0
"FET SW" on Top Layer "FET_SW_L01_P010" (solid, pour order 10): 1442.11,3194.18 1447.94,3200 1525.58,3200 1525.58,2958.08 1462.4,2894.9 1462.4,2555.53 1461.55,2554.68 1300,2554.68 1300,3194.18 1301.14,3195.32 1442.11,3195.32
VBAT_POS on Top Layer "VBAT_POS_L01_P008" (solid, pour order 8): 650,3443.31 650,3500 650,3740.25 1481.74,3740.16 1481.74,200070.02 1481.74,3300 1481.74,3200 650,3200
GND on Top Layer "GND_L01_P007" (solid, pour order 7): 1688.98,2082.76 1679.07,2072.85 1679.07,1841.57 1637.5,1800 1637.5,1400 2200,1400 2200,1850 1727.71,1850 1724.61,1853.1 1724.61,2078.5
FB on Top Layer "FB_L01_P005" (solid, pour order 5): 1724.61,2078.5 1724.61,1925.51 1725.51,1926.41 1900,1926.41 1900,2202.87 1897.16,2205.71 1891.45,2200 1800,2200 1800,2078.5
SW on Top Layer "SW_L01_P004" (solid, pour order 4): 1681.06,2000 1681.06,2096.03 1677.09,2100 1400,2100 1400,1856.2 1406.2,1850 1550,1850 1550,2000
VIN on Top Layer "VIN_L01_P003" (solid, pour order 3): 1350,2100 1700,2100 1700,2550 1575,2550 1575,2925 1550,2950 1462.4,2950 1462.4,2600 1350,2487.6 1350,2250

## Keep-outs
Keep-Out Layer:
  lines w10: 10.01,196.92 ccw(c194.35,199.35) 10.01,196.88 ; 5,196.85 ccw(c194.35,199.35) 196.85,10 cw(c194.35,199.35) 5,196.85 ; 5,196.85 5,3740.16 ; 5,196.85 5,3740.16 ; 5,3740.16 cw(c199.35,3742.66) 196.85,3937.01 ; 5,3740.16 cw(c199.35,3742.66) 196.85,3937.01 ; 10.01,196.88 ccw(c194.35,199.35) 196.78,15.01 cw(c196.85,10) 196.85,15.02 2160.35,15.02 cw(c2160.35,10) 2160.58,15.01 ccw(c2167.85,204.35) 2357.19,196.95 2357.19,3740.13 ccw(c2162.85,3737.66) 2160.45,3931.99 ; 10.01,196.88 10.01,3740.16 ccw(c5,3740.16) 10.01,3740.25 ; 10.01,3740.25 ccw(c199.35,3742.66) 10.01,3740.22 10.01,3740.25 ; 10.01,3740.25 cw(c199.35,3742.66) 196.91,3931.99 ccw(c196.85,3937.01) 198.43,3932.25 ccw(c200,3937.01) 200,3931.99 2160.35,3931.99 ccw(c2160.35,3937.01) 2160.45,3931.99 ; 196.85,3937.01 196.85,3937.01 ; 196.85,3937.01 196.85,3937.01 ; 2160.45,3931.99 ccw(c2162.85,3737.66) 2160.42,3931.99 ; 2160.42,3931.99 2160.45,3931.99

## Silkscreen, mask and mechanical layers (free items; w line width, h text height)
Top Overlay:
  text "ECE 453 Power Board" at 500,850 h200 r90
  text "Team #6" at 200,-50 h200
Mechanical 2:
  lines w10: 196.85,3937.01 ccw(c199.35,3742.66) 5,3740.16 5,196.85 ccw(c194.35,199.35) 196.85,10 ; 200,3937.01 2160.35,3937.01 cw(c2162.85,3737.66) 2362.2,3740.16 2362.2,196.85 cw(c2167.85,204.35) 2160.35,10 196.85,10 ; 196.85,10 196.85,10

## Dimensions
1799.61,787.28 to 231.22,787.4 on Mechanical 5
2199.72,3543.31 to 2199.61,787.28 on Mechanical 5
231.22,3543.31 to 231.22,787.4 on Mechanical 5
231.22,3543.31 to 2199.72,3543.31 on Mechanical 5

## Text inside footprints (layer, text, board x,y; h text height)
BT1: Top Overlay "+" at 800,3564.96 h196.85 r90